# Altium PCB Diverter.PcbDoc
Units mm, origin at the board's own origin, x right, y up, seen from the top; angles counter-clockwise.
Board outline 45.5 x 98 mm, 2 copper layers (Top Layer, Bottom Layer); 85 components, 53 nets, 237 pads, 38 vias.
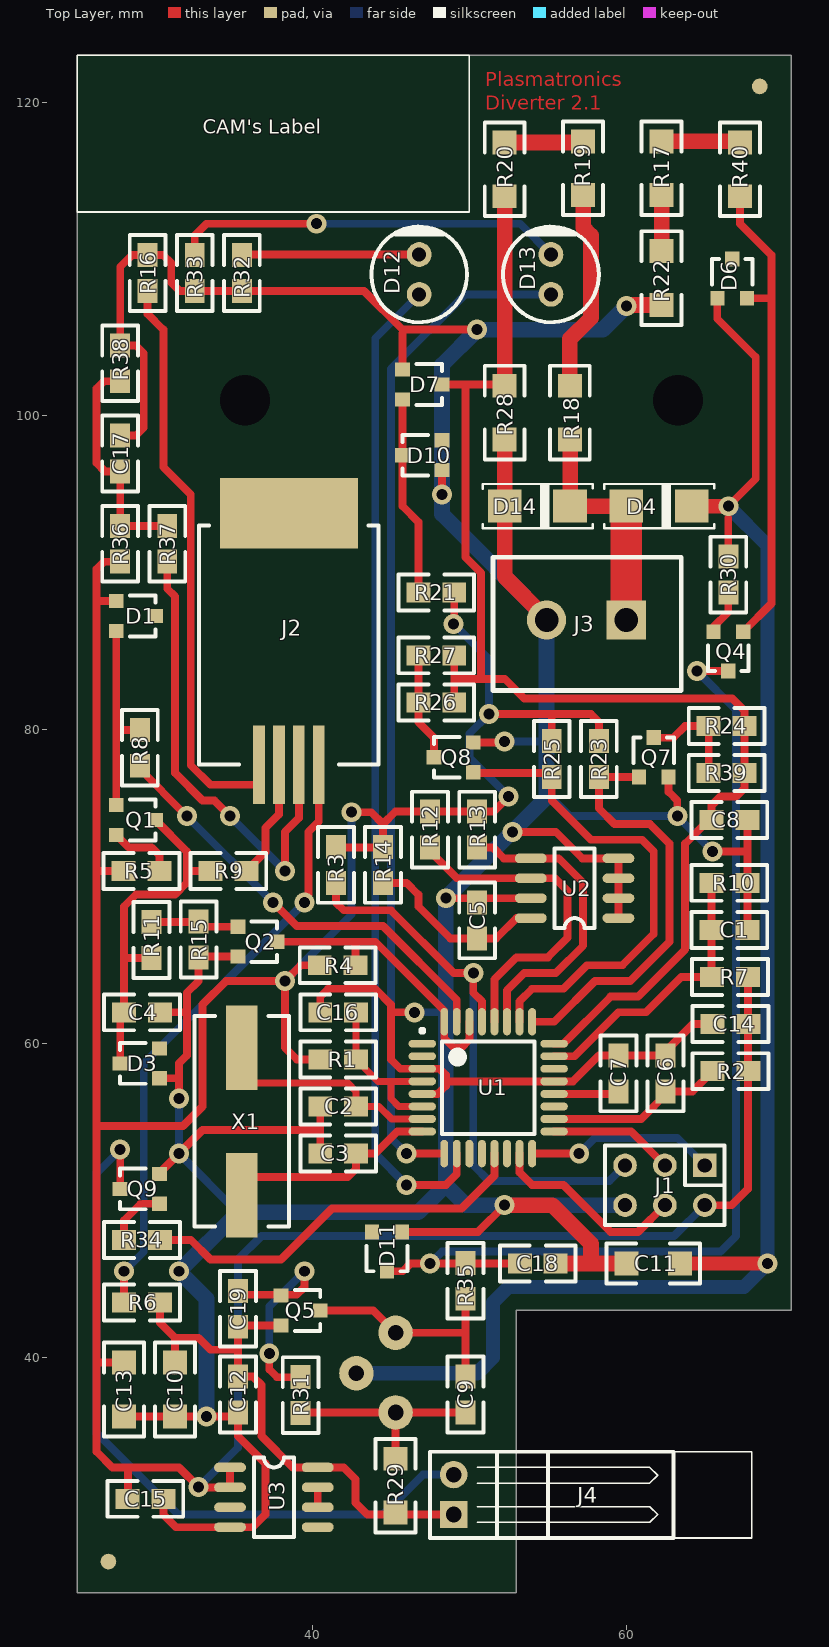
[diagram p0: Top Layer view]
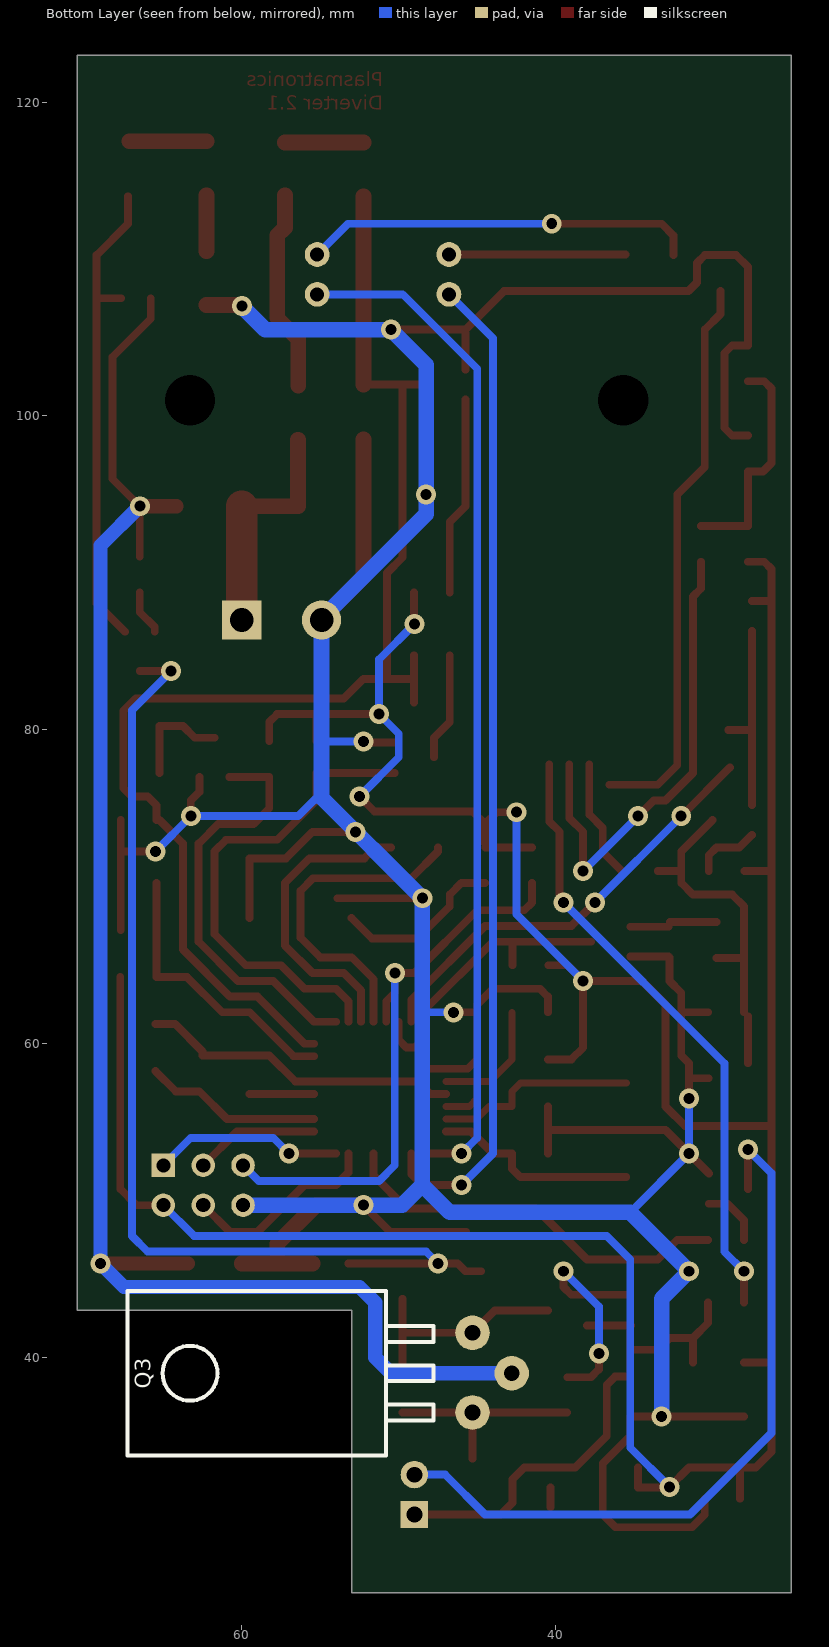
[diagram p1: Bottom Layer view, seen from below]

## Layer stack, top to bottom
Top Layer: signal copper 0.0356
Dielectric: dielectric 0.32, FR-4, Dk 4.8
Bottom Layer: signal copper 0.0356

## Board outline
25,25 53,25.009 53,43 70.5,43 70.5,123 25,123

## Design rules (kind name [scope] priority, off if disabled: settings)
Clearance [All] p1: gap=0.5
ComponentClearance [All] p1: gap=0.254 collisioncheckmode=3 verticalgap=0.254
HoleSize [All] p1: absolutevalues=TRUE maxlimit=8 minlimit=0.025 maxpercent=80.000 minpercent=20.000
PolygonConnect [All] p1: connectstyle=Relief reliefconductorwidth=0.254 reliefentries=4 polygonreliefangle="90 Angle"
RoutingVias [All] p1: holewidth=0.7 width=1.27 viastyle="Through Hole" minholewidth=0.7 minwidth=1 maxholewidth=1 maxwidth=2
SolderMaskExpansion [All] p1: expansion=0.102
TestPointUsage [All] p1: valid=0 allowmultiple=FALSE
Testpoint [All] p1: side=15 testpointundercomponent=TRUE minsize=1.016 maxsize=2.54 preferedsize=1.524 minholesize=0 maxholesize=1.016 preferedholesize=0.813 testpointgrid=0.025 style=1023 order=0123456789
Width [All] p1: maxlimit=5 minlimit=0.254 preferedwidth=0.5
17 further rules are at their usual default settings.

## Components (designator, comment, footprint, x,y, rotation, side; value= is the part's Value field where it differs from the comment)
C1 "100N" 0805 67.714,67.25 r180 top
C2 "15P" 0805 40.5,56 r0 top
C3 "15P" 0805 40.5,53 r0 top
C4 "100P" 0805 28,62 r0 top
C5 "100N" 0805 50.5,69 r270 top
C6 "100N" 0805 62.5,59.25 r270 top
C7 "100N" 0805 59.5,59.25 r270 top
C8 "10N" 0805 67.714,74.25 r180 top
C9 "10N" 0805 49.75,36.5 r90 top
C10 "10U" 1206 31.25,36.25 r90 top
C11 "1U" 1206 60,46 r0 top
C12 "100N" 0805 35.25,36.5 r90 top
C13 "10U" 1206 28,36.25 r90 top
C14 "100N" 0805 65.5,61.25 r0 top
C15 "100N" 0805 30.5,31 r180 top
C16 "100N" 0805 40.5,62 r0 top
C17 "100P" 0805 27.75,96.464 r90 top
C18 "100N" 0805 55.5,46 r180 top
C19 "10N" 0805 35.25,44.25 r270 top
D1 "BAV199" SOT23 28.75,87.25 r270 top
D3 "BZX84C5V6" SOT23 29,58.75 r90 top
D4 "D-S1J" SMA 64,94.25 r0 top
D6 "BAV199" SOT23 66.75,108.75 r0 top
D7 "BAV199" SOT23 47,102 r270 top
D10 "BZX84C3V9" SOT23 47,97.5 r90 top
D11 "BZX84C12V" SOT23 44.75,46.75 r180 top
D12 "LED GREEN" LED5MM 46.8,107.75 r90 top locked
D13 "AMBER" LED5MM 55.2,107.75 r90 top locked
D14 "D-SMAJ85CA" SMA 56.25,94.25 r0 top
J1 "NOT LOADED" HDR3X2 65,52.25 r180 top
J2 "RJ10" MOLEX85513 38.5,75.25 r0 top locked
J3 "TERMINAL" CTB9308 60,87 r180 top locked
J4 "CONNECTOR" CON2RA 49,30 r90 top locked
Q1 "BC857" SOT23 28.75,74.25 r270 top
Q2 "BC847" SOT23 36.5,66.5 r270 top
Q3 "BDW93CFP" TO220F 63.3,39 r90 bottom locked
Q4 "MMBTA92" SOT23 66.5,85 r180 top
Q5 "BC847" SOT23 39.25,43 r270 top
Q7 "BSS123" SOT23 61.75,78.25 r0 top
Q8 "BSS123" SOT23 49,78.25 r90 top
Q9 "BC847" SOT23 29,50.75 r90 top
R1 "1R" 0805 42.786,59 r180 top
R2 "1R" 0805 65.5,58.25 r0 top
R3 "10K" 0805 41.5,70.25 r90 top
R4 "10K" 0805 42.75,65 r180 top
R5 "47R" 0805 30.25,71 r180 top
R6 "1R" 0805 28,43.5 r0 top
R7 "47K" 0805 65.464,64.25 r0 top
R8 "10K" 0805 29,80 r270 top
R9 "47R" 0805 33.5,71 r0 top
R10 "100K" 0805 67.714,70.25 r180 top
R11 "4K7" 0805 29.75,67.75 r270 top
R12 "10K" 0805 47.5,72.5 r90 top
R13 "10K" 0805 50.5,72.5 r90 top
R14 "1R" 0805 44.5,70.25 r90 top
R15 "1K5" 0805 32.75,65.5 r90 top
R16 "1R" 0805 29.5,110.25 r270 top
R17 "11K" 1206 62.25,117.5 r270 top
R18 "12K" 1206 56.4,98.5 r90 top
R19 "11K" 1206 57.25,117.5 r270 top
R20 "11K" 1206 52.25,114 r90 top
R21 "1K" 0805 46.75,88.75 r0 top
R22 "11K" 1206 62.25,110.5 r270 top
R23 "47K" 0805 58.25,77 r90 top
R24 "12K" 0805 65.25,80.25 r0 top
R25 "47K" 0805 55.25,77 r90 top
R26 "12K" 0805 46.75,81.75 r0 top
R27 "27K" 0805 46.75,84.75 r0 top
R28 "11K" 1206 52.25,98.5 r90 top
R29 "4R7" 1206 45.3,33.55 r270 top
R30 "560R" 0805 66.5,88.75 r90 top
R31 "1K" 0805 39.25,38.75 r270 top
R32 "1K" 0805 35.5,110.25 r270 top
R33 "560R" 0805 32.5,110.25 r270 top
R34 "10K" 0805 28,47.5 r0 top
R35 "1K" 0805 49.75,43.75 r90 top
R36 "10K" 0805 27.75,93 r270 top
R37 "47R" 0805 30.75,93 r270 top
R38 "10K" 0805 27.75,104.5 r270 top
R39 "3K6" 0805 65.25,77.25 r0 top
R40 "11K" 1206 67.25,114 r90 top
U1 "ATMEGA168" TQFP32 47,60 r0 top
U2 "U-AT24CM02" SO8 59.5,68 r180 top
U3 "LP2951CD" SO8 34.75,33 r0 top
X1 "3.6864MHz" HC49 35.5,59.75 r270 top

## Footprints (in the part's own frame and the unit in brackets; to place one, negate y for a bottom-side part, rotate by r counter-clockwise, add the part's x,y. Pads: shape width x height; smd on the part's side, far side on the other; paste and mask are expansions set on the pad)
0805 [mil] "SMD 0805"
  rect 60x50 smd: 1(0,0) 2(90,0)
  silkscreen extent -50,-45 140,45
1206 [mil] "SMD 1206"
  rect 60x60 smd: 1(0,0) 2(135,0)
  silkscreen extent -50,-50 185,50
CON2RA [mm] "SIL CONNECTOR"
  rect 1.75x1.75 hole 1: 1(0,0)
  round 1.75 hole 1: 2(2.54,0)
  silkscreen extent -1.5,-19 4,1.5
CTB9308 [mm] "PLUGGABLE SCREW TERMINAL"
  rect 2.5x2.5 hole 1.5: 1(0,0)
  round 2.5 hole 1.5: 2(5.08,0)
  silkscreen extent -3.5,-4 8.5,4.5
HC49 [mm]
  rect 5.4x2 smd: 1(0,0) 2(9.4,0)
  silkscreen extent -2,-3 11.4,3
HDR3X2 [mm] "Header 3 x 2"
  rect 1.5x1.5 hole 0.9: 1(0,0)
  round 1.5 hole 0.9: 2(0,2.54) 3(2.54,0) 4(2.54,2.54) 5(5.08,0) 6(5.08,2.54)
  silkscreen extent -1.27,-1.27 6.35,3.81
LED5MM [mil]
  round 62 hole 35.43: 1(0,0) 2(100,0)
  silkscreen extent -70,-120 170,120
MOLEX85513 [mm] "MOD JACK 4P4C SMD"
  rect 8.8x4.5 smd: 0(0,18.55)
  rect 0.75x5 smd: 1(1.905,2.54) 2(0.635,2.54) 3(-0.635,2.54) 4(-1.905,2.54)
  silkscreen extent -5.71,2.54 5.71,17.78
SMA [mm]
  rect 2.15x2.1 smd: 1(-4,0) 2(0.17,0)
  silkscreen extent -5.4,-1.41 1.6,1.41
SO8 [mil]
  oval 80x24 smd: 1(0,0) 2(0,-50) 3(0,-100) 4(0,-150) 5(220,-150) 6(220,-100) 7(220,-50) 8(220,0)
  silkscreen extent 60,-175 160,25
SOT23 [mm] "SOT23"
  rect 0.9x0.95 smd: 1(-0.95,-1.25) 2(0.95,-1.25) 3(0,1.25)
  silkscreen extent -1.3,-0.38 1.3,1.25
TO220F [mm] "TO220 Flat Reverse"
  round 2.2 hole 1: 1(2.58,-18) 2(0,-20.5) 3(-2.5,-18)
  silkscreen extent -5.25,-15.5 5.25,4
TQFP32 [mm]
  oval 1.75x0.5 smd: 1(0,0) 2(0,-0.8) 3(0,-1.6) 4(0,-2.4) 5(0,-3.2) 6(0,-4) 7(0,-4.8) 8(0,-5.6) 17(8.4,-5.6) 18(8.4,-4.8) 19(8.4,-4) 20(8.4,-3.2) 21(8.4,-2.4) 22(8.4,-1.6) 23(8.4,-0.8) 24(8.4,0)
  oval 0.5x1.75 smd: 9(1.4,-7) 10(2.2,-7) 11(3,-7) 12(3.8,-7) 13(4.6,-7) 14(5.4,-7) 15(6.2,-7) 16(7,-7) 25(7,1.4) 26(6.2,1.4) 27(5.4,1.4) 28(4.6,1.4) 29(3.8,1.4) 30(3,1.4) 31(2.2,1.4) 32(1.4,1.4)
  silkscreen extent -0.12,-5.75 7.15,0.95

## Part data
C1 C5 C6 C7 C12 C14 C15 C16 C18: library part C-B100N, "CAPACITOR"
C2 C3: library part C-B15P, "CAPACITOR"
C4 C17: library part C-B100P, "CAPACITOR"
C8 C9 C19: library part C-B10N, "CAPACITOR"
C10 C13: library part C-C10U, "CAPACITOR"
C11: library part C-D1U, "CAPACITOR"
D1 D6 D7: library part D-BAV199, "DUAL DIODE"
D3: library part D-BZX84C5V6, "ZENER DIODE"
D4: "DIODE"
D10: library part D-BZX84C3V9, "ZENER DIODE"
D11: library part D-BZX84C12V, "ZENER DIODE"
D12: library part O-GREEN, "LED"
D13: library part O-AMBER, "LED"
D14: "ZENER DIODE"
J1: library part J-HDR2X3, "CONNECTOR"
J2: library part J-RJ10, "CONNECTOR"
J3: library part J-CON2VRT, "CONNECTOR"
J4: library part J-SSR
Q1: library part Q-BC857, "TRANSISTOR PNP"
Q2 Q5 Q9: library part Q-BC847, "TRANSISTOR NPN"
Q3: library part Q-BDW93CFP, "TRANSISTOR NPN"
Q4: library part Q-MMBTA92, "TRANSISTOR PNP"
Q7 Q8: library part Q-BSS123, "N CH MOSFET"
R1 R2 R6 R14 R16: library part R-B1R, "RESISTOR"
R3 R4 R8 R12 R13 R34 R36 R38: library part R-B10K, "RESISTOR"
R5 R9 R37: library part R-B47R, "RESISTOR"
R7 R23 R25: library part R-B47K, "RESISTOR"
R10: library part R-NTC100K, "THERMISTOR"
R11: library part R-B4K7, "RESISTOR"
R15: library part R-B1K5, "RESISTOR"
R17 R19 R20 R22 R28 R40: library part R-C11K, "RESISTOR"
R18: library part R-C12K, "RESISTOR"
R21 R31 R32 R35: library part R-B1K, "RESISTOR"
R24 R26: library part R-B12K, "RESISTOR"
R27: library part R-B27K, "RESISTOR"
R29: library part R-C4R7, "RESISTOR"
R30 R33: library part R-B560R, "RESISTOR"
R39: library part R-B3K6, "RESISTOR"
U1: library part U-ATMEGA168, "MICROCONTROLLER"
U2: library part U-AT24CM02-SSHD-B, "I2C 2MBIT EEPROM"
U3: library part U-LP2951CD, "VOLTAGE REGULATOR 5V"
X1: library part X-3M6864, "CRYSTAL"

## Free pads (board coordinates)
  round 0 hole 3.2 unplated: 0(35.7,101) 0(63.3,101)
  round 1 smd paste-1 mask+1: 1(27,27) 1(68.5,121)

## Via types
v1: diameter 1.27, hole 0.7, Top Layer to Bottom Layer, tented both sides, 38 vias

## Nets (pads, with @x,y where several pads share a name; then routed paths per layer and width w, separated by ;. In a path a pad name is that pad's centre, name@x,y a point inside that pad or via, vN(x,y) a via of type N, cw(c..) or ccw(c..) an arc to the next point about the centre after c; other vN are vias at no path point)
0V: C1.1 C2.1 C3.1 C4.2 C5.1 C6.1 C7.1 C8.1 C10.1 C11.1 C12.1 C13.1 C14.1 C15.1 C16.1 C17.2 C18.1 D3.1 D7.1 D10.1 D11.1 D14.1 J1.6 J3.2 Q2.2 Q7.2 Q8.2 Q9.2 R10.1 R15.1 R16.1 R22.2 R28.1 R32.2 R33.2 R38.1 U1.3 U1.5 U1.21 U2.1 U2.2 U2.3 U2.4 U2.7 U3.4 | length 333.2
  Top Layer w0.5: C17.2 28.75,98.75 29.25,99.25 29.25,104 28.75,104.5 R38.1 27.75,109.5 28.5,110.25 30.5,110.25 31,109.75 31,108.5 31.536,107.964 43.286,107.964 45.75,105.5 v1(50.5,105.5) ; C13.1@28.25,36.25 C13.1 35.25,36.25 35.25,35 37,33.25 37,30 36.19,29.19 31.31,29.19 30.5,30 C15.1 ; Q9.2@30.225,51.725 33,54.5 40.5,54.5 ; D3.1 31.45,57.8 31.5,57.75 ; C4.2 32,62 ; v1(31.5,56.5) 31.5,58.75 32,59.25 32,63.25 32.75,64 R15.1 ; R15.1@32.8,65.55 Q2.2 ; C3.1 C2.1 ; C16.1 40.5,63 41,63.5 44,63.5 45,62.5 45,59 45.6,58.4 48.1,58.4 48.5,58 48.5,57.313 47.988,56.8 U1.5 ; 45,62 v1(46.5,62) ; D11.1 50.54,48 v1(52.25,49.71) ; D7.1 45.75,105.25 ; v1(48.25,95) D10.1 ; 48.5,57.6 56.6,57.6 58.25,59.25 C6.1 62.5,59.5 64.25,61.25 C14.1 ; v1(48.5,69.27) U2.7 ; Q8.2 v1@51.7,79.2 ; v1(52.75,73.5) 55.5,73.5 57.19,71.81 U2.4 U2.1 ; C18.1 C18.1@55.5,46.01 ; Q7.2 62.7,76.05 63.25,75.5 v1(63.25,74.5) ; v1(65.5,72.25) 67.714,72.25 ; C1.1 C8.1
  Top Layer w1: v1(52.25,49.71) 55.29,49.71 57.75,47.25 57.75,46 ; R28.1 52.25,89.75 54.92,87.08 J3.2 ; C18.1 C11.1 ; v1(60,107) 60.071,107.071 R22.2
  Bottom Layer w0.5: v1(31.5,56.5) v1(31.5,53) 35.25,49.25 ; v1(46.5,62) 48.5,62 ; v1(52.25,79.25) 55,79.25 ; 54.92,76 56.42,74.5 v1(63.25,74.5) v1(65.5,72.25)
  Bottom Layer w1: v1(33.25,36.25) 33.25,43.75 v1(31.5,45.5) 35.25,49.25 46.75,49.25 48.5,51 ; J1.6 49.79,49.71 48.5,51 ; v1(60,107) 58.5,105.5 v1(50.5,105.5) 48.25,103.25 48.25,93.75 54.92,87.08 54.92,75.69 v1(48.5,69.27) 48.5,51
5V: C13.2 C14.2 C15.2 D1.1 J1.2 R1.2 R2.2 R3.2 R4.2 R5.2 R7.2 R12.2 R13.2 R14.2 R21.2 R23.2 R25.2 R36.2 U3.1 U3.2 | length 220.8
  Top Layer w0.5: 26.25,54.75 31.75,54.75 33,56 33,62.5 34.5,64 v1(38.25,64) ; 26.25,71 R5.2 ; 26.25,88.2 D1.1 ; 26.321,39.679 C13.2 ; R36.2 26.714,90.714 26.25,90.25 26.25,34 27.25,33 31.5,33 32.77,31.73 U3.2 ; C15.2@28.25,31 28.25,33 ; U3.2@34.75,31.78 U3.1 ; R4.2 39.25,65 v1(38.25,64) ; R1.2 39,59 38.25,59.75 v1(38.25,64) ; R3.2@41.5,72.5 R14.2@44.464,72.5 ; v1(42.5,74.75) 43.75,74.75 44.5,74 ; R14.2@44.5,72.75 44.5,74 ; v1@49.036,86.786 R21.2 ; v1(51.25,81) 57.75,81 58.25,80.5 R23.2 ; v1(52.5,75.75) 51.536,74.786 45.286,74.786 44.5,74 ; R25.2 55.25,80.75 ; J1.2 66.71,49.71 67.75,50.75 R7.2
  Bottom Layer w0.5: v1(32.75,31.75) 35.25,34.25 35.25,46.25 36.75,47.75 63.04,47.75 J1.2 ; v1(38.25,64) 42.5,68.25 v1(42.5,74.75) ; v1(49,86.75) 51.25,84.5 v1(51.25,81) 50,79.75 50,78.25 v1(52.5,75.75)
12V: C10.2 C12.2 C19.2 J4.1 Q5.2 R6.2 R29.2 U3.8 | length 34.8
  Top Layer w0.5: R6.2 30.286,42.214 31.25,41.25 ; C10.2 31.25,41.25 ; C19.2@35.2,42.05 Q5.2 ; 35.25,40.5 33.5,40.5 32.75,41.25 31.25,41.25 ; C19.2@35.336,42.05 C19.2 C12.2 36.214,38.786 36.75,38.25 36.75,35 38.75,33 42,33 42.75,32.25 42.75,30.75 43.5,30 J4.1
AMB: D13.1 U1.9 | length 65
  Top Layer w0.5: v1(46,53) U1.9
  Bottom Layer w0.5: v1(46,53) 45,54 45,103 49.75,107.75 D13.1
ATN0: Q7.1 R23.1 U1.25 | length 27.1
  Top Layer w0.5: U1.25 55.4,61.4 58,64 60.25,64 62.75,66.5 62.75,72.75 61.5,74 59.25,74 58.25,75 R23.1 Q7.1
ATN1: Q8.1 R25.1 U1.26 | length 31.5
  Top Layer w0.5: Q8.1@50.25,77.25 55.25,77.25 55.25,75.5 57.75,73 61,73 61.75,72.25 61.75,67 59.75,65 57.5,65 56,63.5 54,63.5 53.2,62.7 U1.26
CLK: J1.3 U1.17 | length 8
  Top Layer w0.5: U1.17 60.31,54.4 J1.3
GRN: D12.1 U1.10 | length 63.5
  Top Layer w0.5: v1(46,51) 48.5,51 49.2,51.7 U1.10
  Bottom Layer w0.5: v1(46,51) 44,53 44,104.95 D12.1
MISO: J1.1 U1.16 | length 12.1
  Top Layer w0.5: U1.16 v1(57,53)
  Bottom Layer w0.5: v1(57,53) 58,54 63.25,54 J1.1
MOSI: J1.4 U1.15 | length 12.7
  Top Layer w0.5: U1.15 53.2,51.8 54,51 56,51 59,48 60.75,48 J1.4
NetC2_2: C2.2 U1.7 X1.1 | length 13
  Top Layer w0.45: X1.1@35.5,57.5 42.25,57.5 42.786,56.964 C2.2 44.25,56 45.05,55.2 U1.7
NetC3_2: C3.2 U1.8 X1.2 | length 13.3
  Top Layer w0.5: X1.2@35.5,51.5 42.25,51.5 42.786,52.036 C3.2 44,53 45.4,54.4 U1.8
NetC4_1: C4.1 D3.3 Q1.3 R9.1 R11.2 | length 22.4
  Top Layer w0.5: D3.3 C4.1@27.75,61.75 ; C4.1 28,68.75 28.75,69.5 31.25,69.5 32,70.25 32,72.25 Q1.3 ; 28.036,65.464 R11.2 ; 32,71 R9.1
NetC5_2: C5.2 R14.1 U2.8 | length 10.9
  Top Layer w0.5: R14.1 46,70.25 46.75,69.5 46.75,68.75 48.786,66.714 51.714,66.714 U2.8@53,68
NetC6_2: C6.2 R2.1 U1.18 | length 11.4
  Top Layer w0.5: U1.18 60.95,55.2 62.714,56.964 64.214,56.964 R2.1
NetC7_2: C7.2 U1.20 | length 4.1
  Top Layer w0.5: U1.20 C7.2@59.5,56.8
NetC9_1: C9.1 Q3.3 R29.1 R31.2 | length 13.4
  Top Layer w0.5: R31.2@39.286,36.5 C9.1 ; R29.1 Q3.3
NetC9_2: C9.2 Q3.1 Q5.3 R35.1 | length 14.8
  Top Layer w0.5: Q5.3 43.88,43 Q3.1 49.67,41.58 49.75,41.5 ; C9.2 R35.1
NetC11_2: C11.2 D4.2 D6.1 Q3.2 R30.2 | length 105.8
  Top Layer w0.5: D6.1 65.8,106.2 68.25,103.75 68.25,96 v1(66.5,94.25) ; R30.2 66.5,93.5
  Top Layer w0.9: C11.2 v1(69,46) ; D4.2 v1(66.5,94.25)
  Bottom Layer w0.9: Q3.2 50.5,39 51.5,40 51.5,43.5 52.5,44.5 67.5,44.5 v1(69,46) 69,91.75 v1(66.5,94.25)
NetC16_2: C16.2 R1.1 U1.4 U1.6 | length 11.1
  Top Layer w0.45: C16.2 R1.1 44.186,57.6 U1.4 ; 45,57.6 45,56.5 45.5,56 U1.6
NetC17_1: C17.1 R36.1 R37.1 R38.2 | length 14.6
  Top Layer w0.5: R38.2 26.714,102.214 26.25,101.75 26.25,97 26.786,96.464 C17.1 R36.1 R37.1
NetC18_2: C18.2 D11.3 Q4.3 R35.2 | length 67.9
  Top Layer w0.5: D11.3 45.75,45.5 46.25,46 C18.2 ; v1(64.5,83.75) Q4.3
  Bottom Layer w0.5: v1(47.5,46) 48.25,46.75 66,46.75 67,47.75 67,81.25 v1(64.5,83.75)
NetC19_1: C19.1 Q5.1 R31.1 | length 14.8
  Top Layer w0.5: C19.1@35.25,44 39,44 39.5,44.5 v1(39.5,45.5) ; v1(37.25,40.25) 37.25,39.25 37.75,38.75 R31.1
  Bottom Layer w0.5: v1(37.25,40.25) 37.25,43.25 v1(39.5,45.5)
NetD1_2: D1.2 Q1.1 R8.1 | length 12.9
  Top Layer w0.5: Q1.1 27.5,84.25 ; 27.5,80 R8.1 ; 27.5,84 D1.2
NetD4_1: D4.1 D14.2 J3.1 R18.1 | length 15.1
  Top Layer w1: R18.1@56.42,98.48 D14.2 D4.1
  Top Layer w2: J3.1 D4.1
NetD6_2: D6.2 Q4.1 R40.1 | length 30.9
  Top Layer w0.5: R40.1 67.25,112.25 69.25,110.25 69.25,88.05 Q4.1 ; D6.2 69.25,107.5
NetD7_2: D7.2 D10.3 R21.1 | length 12.7
  Top Layer w0.5: D7.2 45.75,94.25 46.75,93.25 R21.1
NetD12_2: D12.2 R32.1 | length 11.3
  Top Layer w0.5: R32.1@35.54,110.29 D12.2
NetD13_2: D13.2 R33.1 | length 25.1
  Top Layer w0.5: R33.1 32.5,111.5 33.25,112.25 v1(40.25,112.25)
  Bottom Layer w0.5: v1(40.25,112.25) 53.24,112.25 D13.2
NetJ2_1: J2.1 R6.1 | length 39.8
  Top Layer w0.5: R6.1 v1(28,45.5) ; v1(39.5,69) 39.25,69 39.75,69.5 39.75,73.5 40.405,74.155 J2.1
  Bottom Layer w0.5: v1(28,45.5) 29.25,46.75 29.25,58.75 v1(39.5,69)
NetJ2_2: J2.2 R37.2 | length 30.4
  Top Layer w0.5: R37.2 30.75,89 31.25,88.5 31.25,77.25 33,75.5 33.75,75.5 v1(34.75,74.5) ; v1(38.25,71) 38.25,73.5 39.135,74.385 J2.2
  Bottom Layer w0.5: v1(34.75,74.5) v1(38.25,71)
NetJ2_3: J2.3 R9.2 | length 7.7
  Top Layer w0.5: R9.2 37,72.214 37,73.75 37.865,74.615 J2.3
NetJ2_4: J2.4 R16.2 | length 36.2
  Top Layer w0.5: R16.2 29.5,106.5 30.5,105.5 30.5,96.75 32.25,95 32.25,77.75 33.5,76.5 J2.4@36.562,76.5
NetJ4_2: J4.2 Q9.3 | length 47.1
  Top Layer w0.5: Q9.3 v1(27.75,53.25)
  Bottom Layer w0.5: v1(27.75,53.25) 26.25,51.75 26.25,35.19 31.44,30 44.5,30 47.04,32.54 J4.2
NetQ1_2: Q1.2 R5.1 | length 4.3
  Top Layer w0.5: Q1.2 28.3,72.5 29.75,72.5 30.25,72 R5.1
NetQ2_1: Q2.1 R11.1 R15.2 | length 5.4
  Top Layer w0.5: R11.1 R15.2@32.714,67.75 ; R15.2@32.8,67.45 Q2.1
NetQ4_2: Q4.2 R30.1 | length 2.9
  Top Layer w0.5: Q4.2 65.55,86.55 66.5,87.5 R30.1
NetQ7_3: Q7.3 R24.1 R39.1 | length 6.8
  Top Layer w0.5: Q7.3 63,79.5 63.75,80.25 R24.1 R39.1
NetQ8_3: Q8.3 R26.1 R27.1 | length 6.9
  Top Layer w0.5: R27.1 46.75,80.5 47.75,79.5 Q8.3
NetQ9_1: Q9.1 R34.1 | length 3.9
  Top Layer w0.5: R34.1 28,48.75 29.05,49.8 Q9.1
NetR17_1: R17.1 R40.2 | length 4.9
  Top Layer w1: R17.1 R40.2@67.179,117.5
NetR17_2: R17.2 R22.1 | length 3.6
  Top Layer w1: R22.1 R17.2
NetR18_2: R18.2 R19.2 | length 12.9
  Top Layer w1: R18.2 56.4,104.9 57.75,106.25 57.75,111.5 57.25,112 R19.2
NetR19_1: R19.1 R20.2 | length 5
  Top Layer w1: R20.2 R19.1@57.25,117.429
NetU3_6: U3.6 U3.7 | length 1.3
  Top Layer w0.5: U3.6 U3.7
R\S\T\: J1.5 R3.1 U1.29 | length 37.9
  Top Layer w0.5: R3.1 41.5,69 42,68.5 45,68.5 49,64.5 v1(50.25,64.5) 50.25,63.25 50.8,62.7 U1.29
  Bottom Layer w0.5: v1(50.25,64.5) 50.25,52.25 51.25,51.25 58.92,51.25 J1.5
RX: Q2.3 R4.1 U1.30 U1.32 | length 18.7
  Top Layer w0.5: Q2.3 44,66.5 48.4,62.1 48.4,60.35 49,59.75 49.5,59.75 50,60.25 U1.30 ; R4.1 42.75,66.25
SCL: R12.1 U1.28 U2.6 | length 21.5
  Top Layer w0.5: R12.1 47.5,72.25 49.21,70.54 55.46,70.54 56.25,69.75 56.25,66.75 55,65.5 53,65.5 51.6,64.1 U1.28
SDA: R13.1 U1.27 U2.5 | length 19.7
  Top Layer w0.5: R13.1 51.5,72.5 52.19,71.81 55.69,71.81 57.25,70.25 57.25,66.25 55.5,64.5 53.5,64.5 52.4,63.4 U1.27
SSR: R34.2 U1.13 | length 25.4
  Top Layer w0.5: R34.2 32.25,47.5 33.5,46.25 38,46.25 41.25,49.5 49.5,49.5 51.6,51.6 U1.13
TEMP: C1.2 R7.1 R10.2 U1.23 | length 18.1
  Top Layer w0.5: U1.23 56.7,59.2 59.5,62 61.25,62 63.5,64.25 65.428,64.25 R10.2
TX: R8.2 U1.31 | length 27.8
  Top Layer w0.5: R8.2@28.893,77.607 v1(32,74.5) ; v1(37.5,69) 39,67.5 44.5,67.5 49.2,62.8 U1.31
  Bottom Layer w0.5: v1(32,74.5) v1(37.5,69)
VBAT: C8.2 D7.3 R20.1 R24.2 R26.2 R27.2 R28.2 R39.2 U1.24 | length 85.6
  Top Layer w0.5: D7.3 R28.2@52.25,102 ; R26.2 R27.2 ; 49.036,83.25 52.25,83.25 53.5,82 66.75,82 67.536,81.214 67.536,76.286 67,75.75 66,75.75 65.428,75.178 C8.2 ; 49.75,102 49.75,91 50.75,90 50.75,83.25 ; U1.24 56,60 59,63 60.75,63 63.75,66 63.75,72.75 C8.2@65.25,74.25
  Top Layer w1: R28.2@52.25,102 R20.1
pads on no net: D1.3 D3.2 D6.3 D10.2 D11.2 J2.0 U1.1 U1.2 U1.11 U1.12 U1.14 U1.19 U1.22 U3.3 U3.5

## Other copper
Top Layer:
  text "Plasmatronics" at 51,121 h0.9
  text "Diverter 2.1" at 51,119.5 h0.9

## Silkscreen, mask and mechanical layers (free items; w line width, h text height)
Top Overlay:
  lines w0.1: 25,113 50,113 50,123 25,123 25,113
  text "CAM's Label" at 33,118 h0.9
Mechanical 1:
  the board outline again, w0.1
Mechanical 3:
  circle w0.1: c47.5,109 r2.6
  circle w0.1: c63.3,101 r1.6
  circle w0.1: c63.3,39 r1.6
  circle w0.1: c35.7,101 r1.6
  circle w0.1: c35.7,101 r4
  circle w0.1: c63.3,101 r4
  circle w0.1: c54.5,109 r2.6
  lines w0.1: 25,25 53,25 53,43 70.5,43 70.5,123 25,123 25,25 ; 32,77 45,77 45,94 32,94 32,77 ; 51,81.5 51,94 64,94 64,81.5 51,81.5